# Altium PCB ESE6710 Coil Interface Board.PcbDoc
Units mil, origin at the board's own origin, x right, y up, seen from the top; angles counter-clockwise.
Board outline 1500 x 1900 mil, 2 copper layers (Top Layer, Bottom Layer), stack 61.756 mil thick; 18 components, 4 nets, 43 pads, 0 vias.
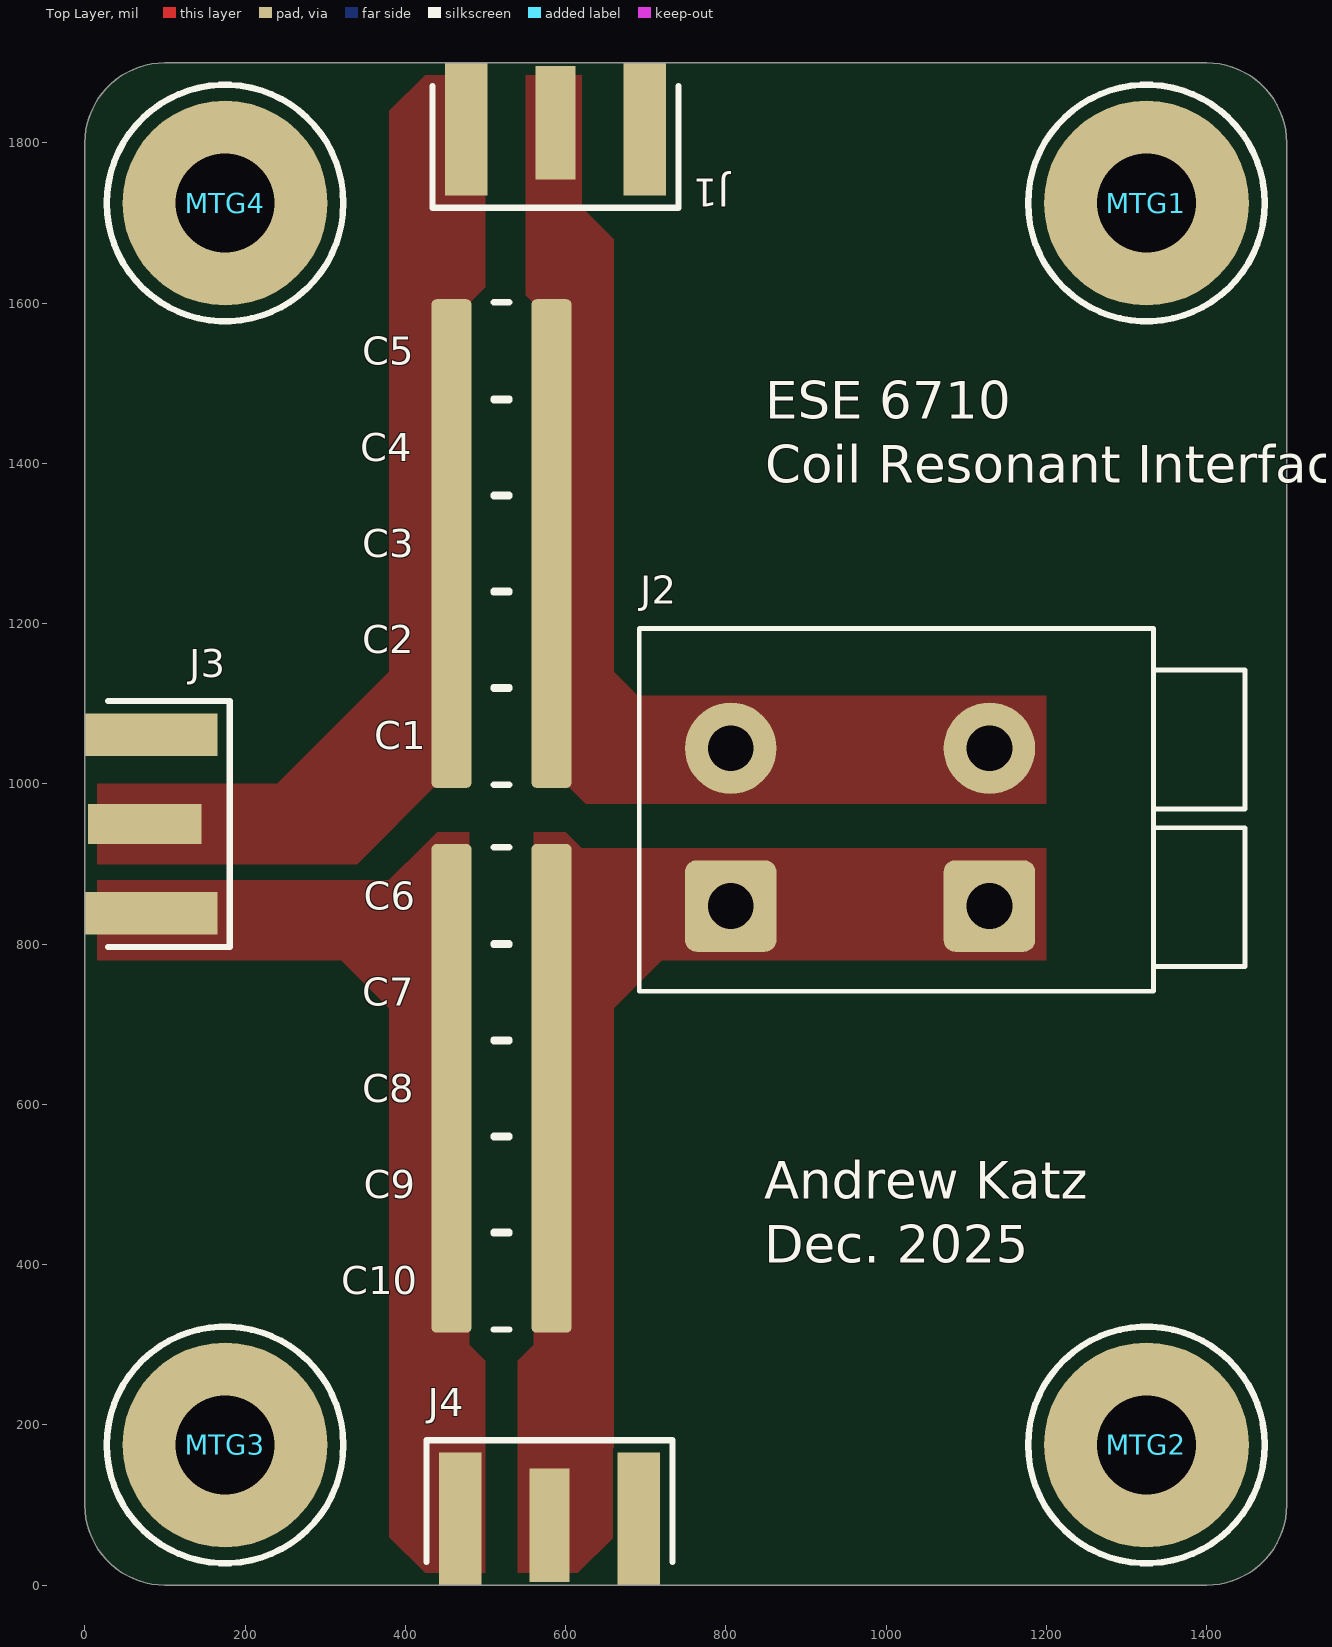
[diagram p0: Top Layer view]
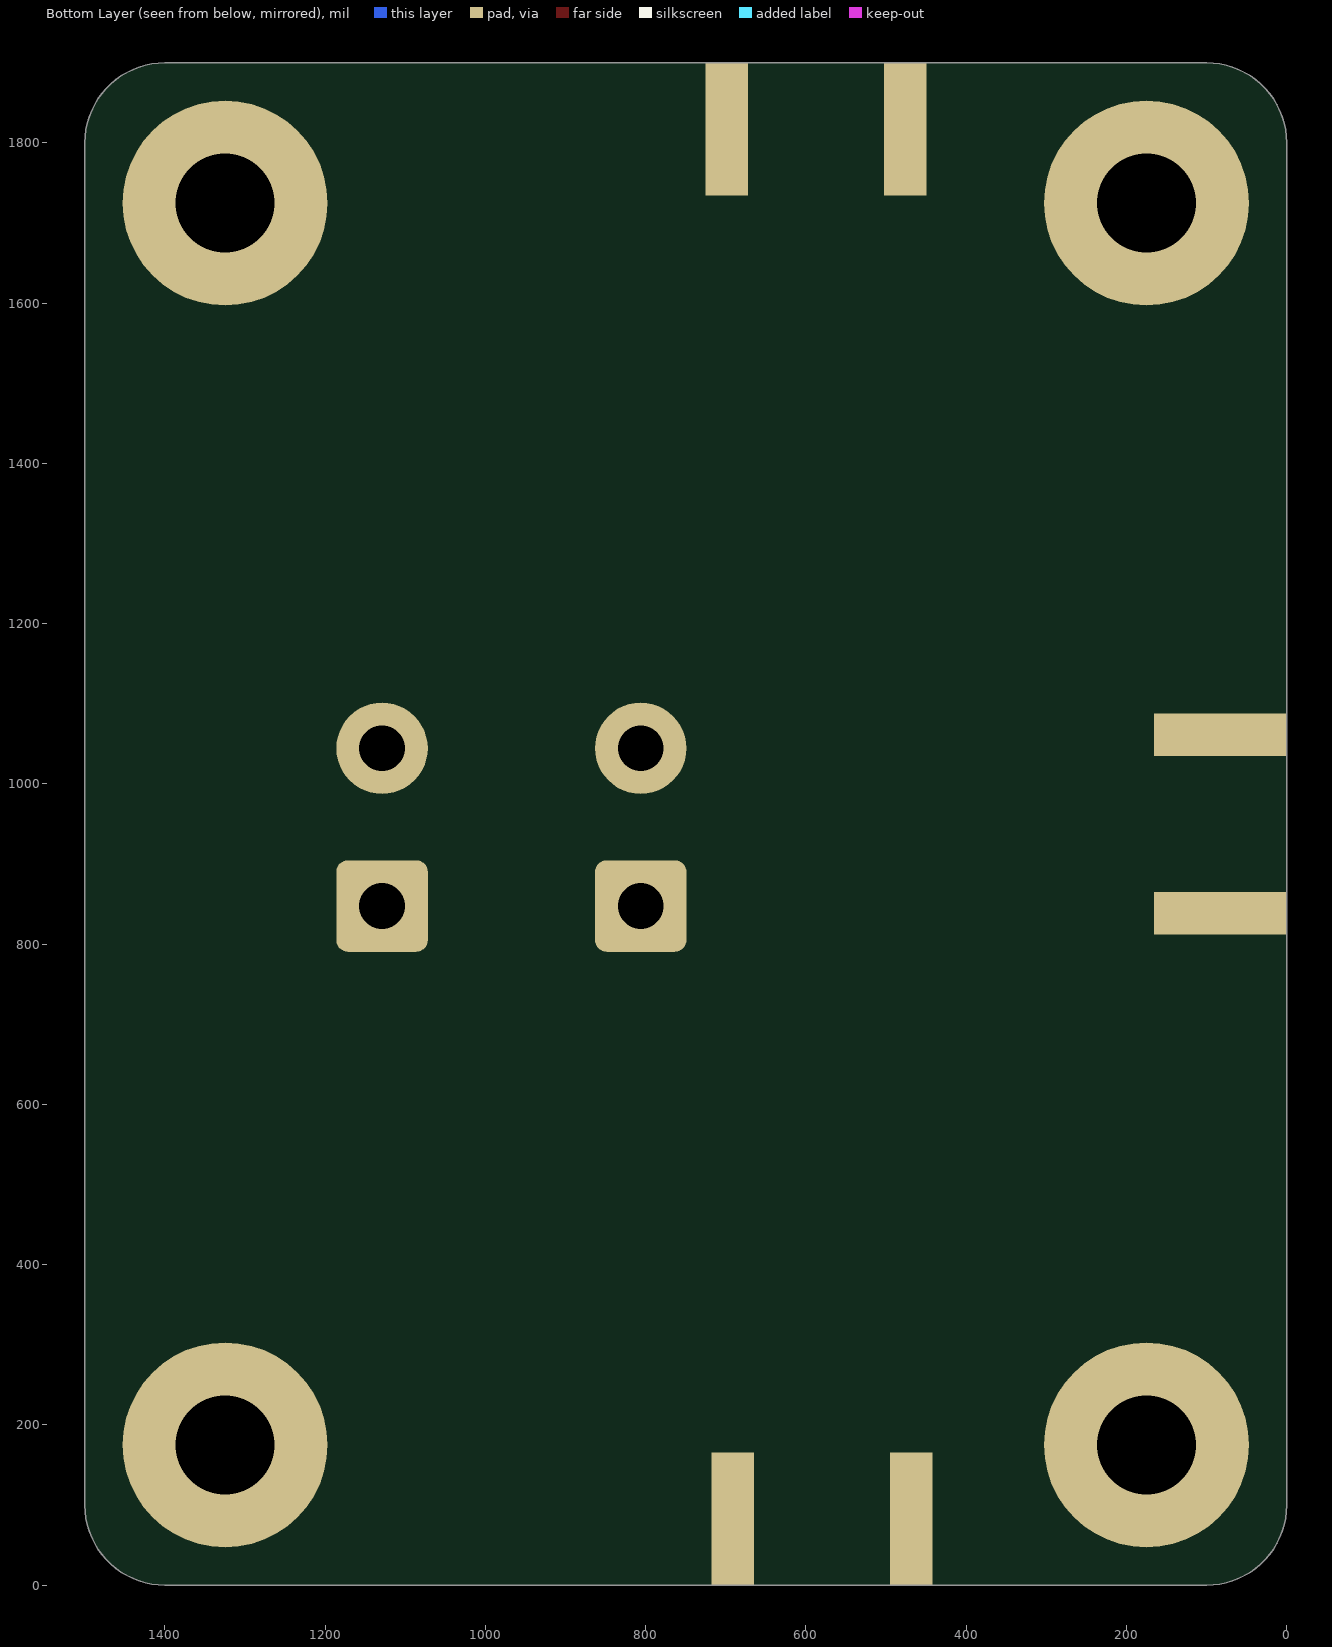
[diagram p1: Bottom Layer view, seen from below]
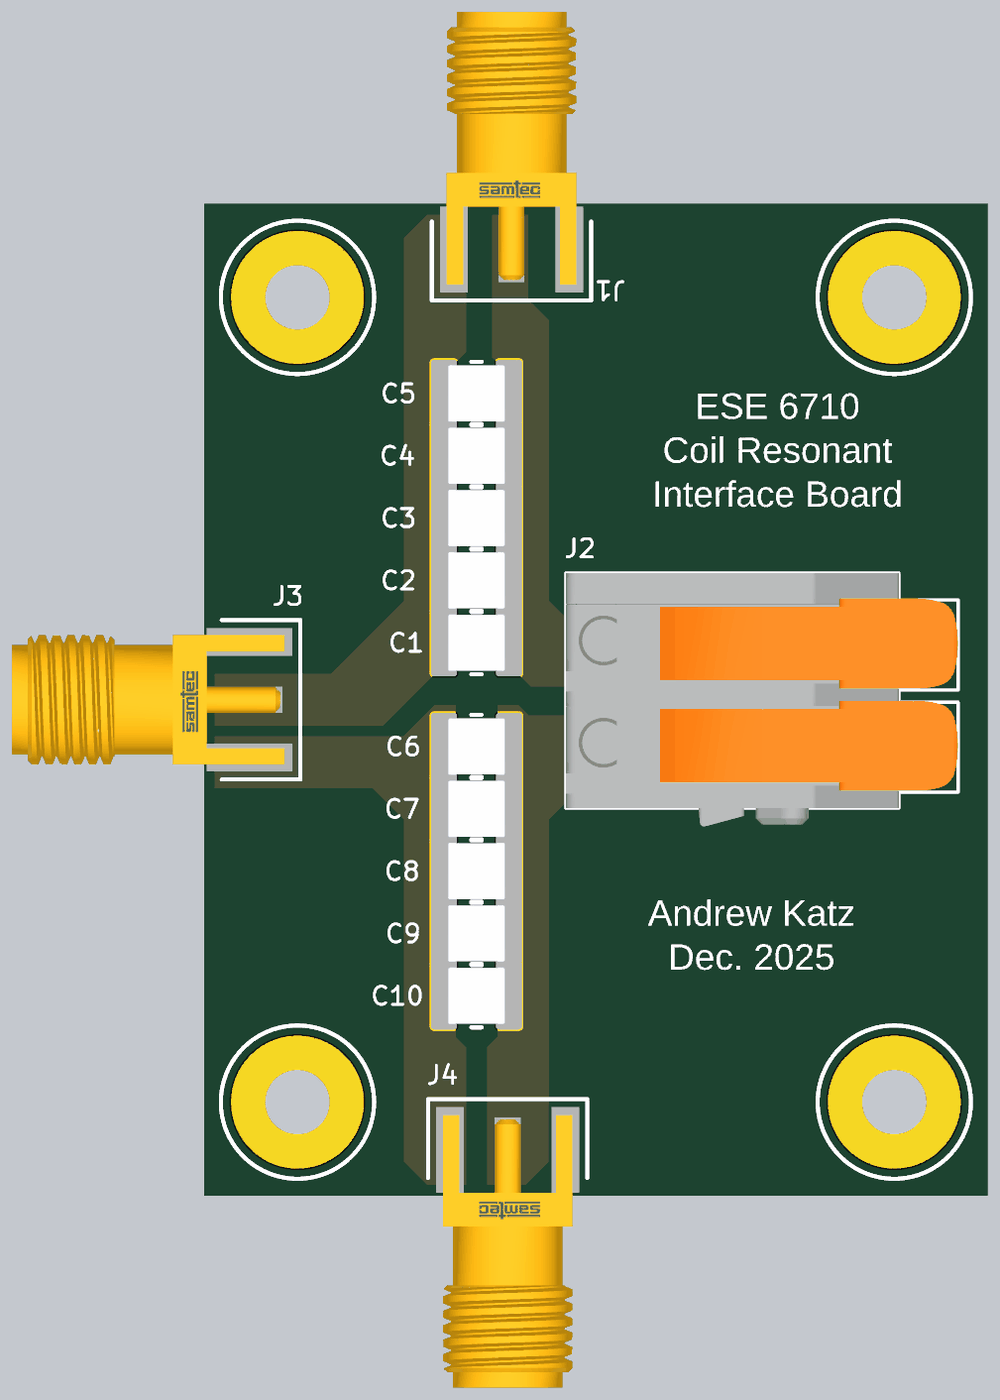
[diagram p2: 3D render of the assembled board from above, using the file's embedded part models]

## Layer stack, top to bottom
Top Solder: solder mask 1, PSR-4000BN, Dk 4.5
Top Layer: signal copper 1.378
Dielectric 1: core 59, Kingboard KB6167F, Dk 4.5
Bottom Layer: signal copper 1.378
Bottom Solder: solder mask 1, PSR-4000BN, Dk 4.5

## Board outline
0,100 0,1800 cw(c100,1800) 100,1900 1400,1900 cw(c1400,1800) 1500,1800 1500,100 cw(c1400,100) 1400,0 100,0 cw(c100,100)

## Design rules (kind name [scope] priority, off if disabled: settings)
AcuteAngle [All] p1: minimum=6.00000000000000E+0001 checktracksonly=FALSE
BoardOutlineClearance [Not HasFootprint('FP-SMA-J-P-H-ST-EM1-MFG')] p1: gap=15 ignorepadtopadclearanceinfootprint=FALSE
Clearance [All] p1: gap=6 ignorepadtopadclearanceinfootprint=FALSE except(0: Arc-Hole Track-Hole SMDPad-Hole THPad-Hole Via-Hole Fill-Hole Poly-Hole Region-Hole Text-Hole)
ComponentClearance [All] p1: gap=1 collisioncheckmode=3 verticalgap=1 showdistances=FALSE
DiffPairsRouting [All] p1: maxlimit=393.7 minlimit=6 mostfreqgap=8 toplayer_minwidth=6 toplayer_maxwidth=15 toplayer_prefwidth=8 bottomlayer_minwidth=6 bottomlayer_maxwidth=15 bottomlayer_prefwidth=8 maxuncoupledlength=500
HoleSize SlotSize [(HoleType = 'Slot')] p1: absolutevalues=TRUE maxlimit=265 minlimit=20 maxpercent=80.000 minpercent=20.000
HoleSize [All] p2: absolutevalues=TRUE maxlimit=265 minlimit=10 maxpercent=80.000 minpercent=20.000
HoleToHoleClearance [All] p1: gap=10 allowstackedmicrovias=FALSE
MinimumAnnularRing [All] p1: minimumring=5
MinimumSolderMaskSliver [All] p1: minsoldermaskwidth=0
PlaneClearance [All] p1: clearance=10
PlaneConnect [All] p1: planeconnectstyle=Direct reliefexpansion=16 reliefentries=4 reliefconductorwidth=6 reliefairgap=6
PolygonConnect [All] p1: connectstyle=Direct reliefconductorwidth=10 reliefentries=4 polygonreliefangle="90 Angle" airgapwidth=10
RoutingCorners [All] p1: cornerstyle=45-Degree minsetback=49.21 maxsetback=49.21
RoutingVias [All] p1: holewidth=15 width=30 viastyle="Through Hole" minholewidth=13 minwidth=27 maxholewidth=100 maxwidth=114
SMDNeckDown [All] p1: percent=100.000
SilkToSilkClearance SilkTextToSilk [IsText AND OnSilkscreen] p1: silktosilkclearance=5
SilkToSilkClearance [All] p2: silktosilkclearance=0
SilkToSolderMaskClearance [IsPad] p1: minsilkscreentomaskgap=6 clearancetoexposedcopper=TRUE
SolderMaskExpansion "Tent Vias" [IsVia] p1: expansion=4 istentingtop=TRUE
SolderMaskExpansion [All] p2: expansion=2.95 istentingtop=FALSE
Width [All] p1: maxlimit=400 minlimit=6 preferedwidth=8
20 further rules are at their usual default settings.

## Components (designator, comment, footprint, x,y, rotation, side; value= is the part's Value field where it differs from the comment)
C1 "800B100JT500XT1K" "CAP_1111_ATC 800B" 520,1060 r0 top value=10pF
C2 "800B100JT500XT1K" "CAP_1111_ATC 800B" 520,1180 r0 top value=10pF
C3 "800B100JT500XT1K" "CAP_1111_ATC 800B" 520,1300 r0 top value=10pF
C4 "800B100JT500XT1K" "CAP_1111_ATC 800B" 520,1420 r0 top value=10pF
C5 "800B100JT500XT1K" "CAP_1111_ATC 800B" 520,1540 r0 top value=10pF
C6 "800B100JT500XT1K" "CAP_1111_ATC 800B" 520,860 r0 top value=10pF
C7 "800B100JT500XT1K" "CAP_1111_ATC 800B" 520,740 r0 top value=10pF
C8 "800B100JT500XT1K" "CAP_1111_ATC 800B" 520,620 r0 top value=10pF
C9 "800B100JT500XT1K" "CAP_1111_ATC 800B" 520,500 r0 top value=10pF
C10 "800B100JT500XT1K" "CAP_1111_ATC 800B" 520,380 r0 top value=10pF
J1 "CON-SMA-EDGE-S" FP-SMA-J-P-H-ST-EM1-MFG 587.5,1900 r180 top
J2 "2604-1102" 2604-1102_MFG 1070,950 r90 top
J3 "CON-SMA-EDGE-S" FP-SMA-J-P-H-ST-EM1-MFG 0,950 r270 top
J4 "CON-SMA-EDGE-S" FP-SMA-J-P-H-ST-EM1-MFG 580,0 r0 top
MTG1 "M3 Screw Hole" "M3 Screw Hole-Footprint-1" 1325,1725 r0 top
MTG2 "M3 Screw Hole" "M3 Screw Hole-Footprint-1" 1325,175 r0 top
MTG3 "M3 Screw Hole" "M3 Screw Hole-Footprint-1" 175,175 r0 top
MTG4 "M3 Screw Hole" "M3 Screw Hole-Footprint-1" 175,1725 r0 top

## Footprints (in the part's own frame and the unit in brackets; to place one, negate y for a bottom-side part, rotate by r counter-clockwise, add the part's x,y. Pads: shape width x height; smd on the part's side, far side on the other; paste and mask are expansions set on the pad)
2604-1102_MFG [mm] "Recommended Land Pattern"
  rrect25% 2.9x2.9 hole 1.45: 1(-2.6,6.7) 1(-2.6,-1.5)
  round 2.9 hole 1.45: 2(2.4,6.7) 2(2.4,-1.5)
  silkscreen extent -5.3,-9.6 6.2,9.6, body extent -6.2,-9.6 6.2,9.6, height 16.7
"CAP_1111_ATC 800B" [mil] "Chip Capacitor, 2-Leads, Body 2.92x2.79mm, IPC Medium Density"
  rrect25% 50x129.92 smd: 1(-62.5,0) 2(62.5,0)
  silkscreen extent -10,-61 10,61, body extent -55,-55 55,55, height 70
FP-SMA-J-P-H-ST-EM1-MFG [mm]
  rect 1.27x3.6 smd paste+0 mask+0: 1(0,1.9)
  rect 1.35x4.2 smd paste+0 mask+0: 2(-2.825,2.1) 2(2.825,2.1)
  rect 1.35x4.2 smd far side paste+0 mask+0: 2(-2.825,2.1) 2(2.825,2.1)
  silkscreen extent -3.9,0.74 3.9,4.59, body extent -3.18,-9.52 3.18,3.81, height 3.81
"M3 Screw Hole-Footprint-1" [mm]
  round 6.5 hole 3.15: 1(0,0)
  silkscreen extent -3.75,-3.75 3.75,3.75

## Part data
C1 C2 C3 C4 C5 C6 C7 C8 C9 C10: library part CMP-001-00027-1, "Ceramic Capacitor, Multilayer, Ceramic, 500V, 5% +Tol, 5% -Tol, C0G, 30ppm/Cel TC, 0.00001uF, Surface Mount, 1111", Capacitor Type=Ceramic, Case/Package=1111, Max Operating Temperature=125°C, Min Operating Temperature=-55°C, Voltage=500V, China RoHS=Compliant, Dielectric Material=Ceramic, Height=1.78mm, Length=2.79mm, Lifecycle Status=Production, Mount=SMD, Mounting Technology="Surface Mount", Number of Terminals=2, REACH SVHC=Yes, RoHS=Compliant, Voltage Rating (DC)=500V, Width=2.79mm
J1 J3 J4: library part CMP-00788-5, "Sma Female Connector Jack, Pcb Edge Mount Rohs Compliant: Yes", Case/Package=SMA, Frequency=18GHz, Contact Gender=Female, Contact Material=Gold, Height=6.35mm, Impedance=50Ω, Manufacturer Package Identifier=CON-SMA-EDGE-S, Number of Contacts=1, Number of Ports=1, Pins=1, RoHS=Compliant, Shell Material=Brass
J2: library part CMP-00792-2, "Pcb Terminal Block; Operating Lever; 4 MM²; Pin Spacing 5 Mm; 2-POLE; Push-in Cage Clamp®", Color=Grey, Current Rating=20A, Max Operating Temperature=105°C, Min Operating Temperature=-60°C, Voltage Rating=300V, Approvals="CB, CSA, KEMA, UL, cUL", Contact Material=Tin, Height=25.7mm, Housing Color=Grey, Lifecycle Status=Production, Number of Contacts=2, Number of Levels=1, Number of Rows=1, Pins=2, REACH SVHC=Yes, RoHS=Compliant, Wire/Cable Gauge=12AWG
MTG1 MTG2 MTG3 MTG4: library part CMP-00028-5, "Close clearance Fit for M3 Screw Hole; PCB Mounting for M3 Screw"

## Nets (pads, with @x,y where several pads share a name; then routed paths per layer and width w, separated by ;. In a path a pad name is that pad's centre, name@x,y a point inside that pad or via, vN(x,y) a via of type N, cw(c..) or ccw(c..) an arc to the next point about the centre after c; other vN are vias at no path point)
LA: C1.2 C2.2 C3.2 C4.2 C5.2 J1.1 J2.2
LB: C6.2 C7.2 C8.2 C9.2 C10.2 J2.1 J4.1
LCA: C1.1 C2.1 C3.1 C4.1 C5.1 J1.2 J3.1
LCB: C6.1 C7.1 C8.1 C9.1 C10.1 J3.2 J4.2
pads on no net: MTG1.1 MTG2.1 MTG3.1 MTG4.1

## Polygon pours and split planes (outlines as drawn)
LA on Top Layer "LA_L01_P007" (solid, pour order 7): 550,1700 550,1900 620,1900 620,1700
LB on Top Layer "LB_L01_P006" (solid, pour order 6): 680,860 600,940 560,940 560,860
LB on Top Layer "LB_L01_P005" (solid, pour order 5): 1200,920 560,920 560,300 540,280 540,0 600,0 660,60 660,720 720,780 1200,780
LA on Top Layer "LA_L01_P004" (solid, pour order 4): 1200,975 625,975 600,1000 560,1000 560,1600 550,1610 550,1720 620,1720 660,1680 660,1140 690,1110 1200,1110
LCB on Top Layer "LCB_L01_P003" (solid, pour order 3): 360,860 440,940 480,940 480,860
LCB on Top Layer "LCB_L01_P002" (solid, pour order 2): 0,880 480,880 480,300 500,280 500,0 440,0 380,60 380,720 320,780 0,780
LCA on Top Layer "LCA_L01_P001" (solid, pour order 1): 0,900 340,900 440,1000 480,1000 480,1600 500,1620 500,1900 440,1900 380,1840 380,1140 240,1000 0,1000

## Silkscreen, mask and mechanical layers (free items; w line width, h text height)
Top Overlay:
  text "ESE 6710 / Coil Resonant Interface Board" at 849.27,1360.36 h80
  text "Andrew Katz / Dec. 2025" at 848.04,386.58 h80
Board Outline:
  the board outline again, w10

## Text inside footprints (layer, text, board x,y; h text height)
J1: Designer Notes "Board Edge" at 722.14,1959.07 h35 r180
J3: Designer Notes "Board Edge" at -59.07,1084.64 h35 r270
J4: Designer Notes "Board Edge" at 445.36,-59.06 h35